# Altium PCB PCB1.PcbDoc
Units mil, origin at the board's own origin, x right, y up, seen from the top; angles counter-clockwise.
Board outline 3150 x 2365 mil, 2 copper layers (Top Layer, Bottom Layer); 17 components, 21 nets, 79 pads, 0 vias.
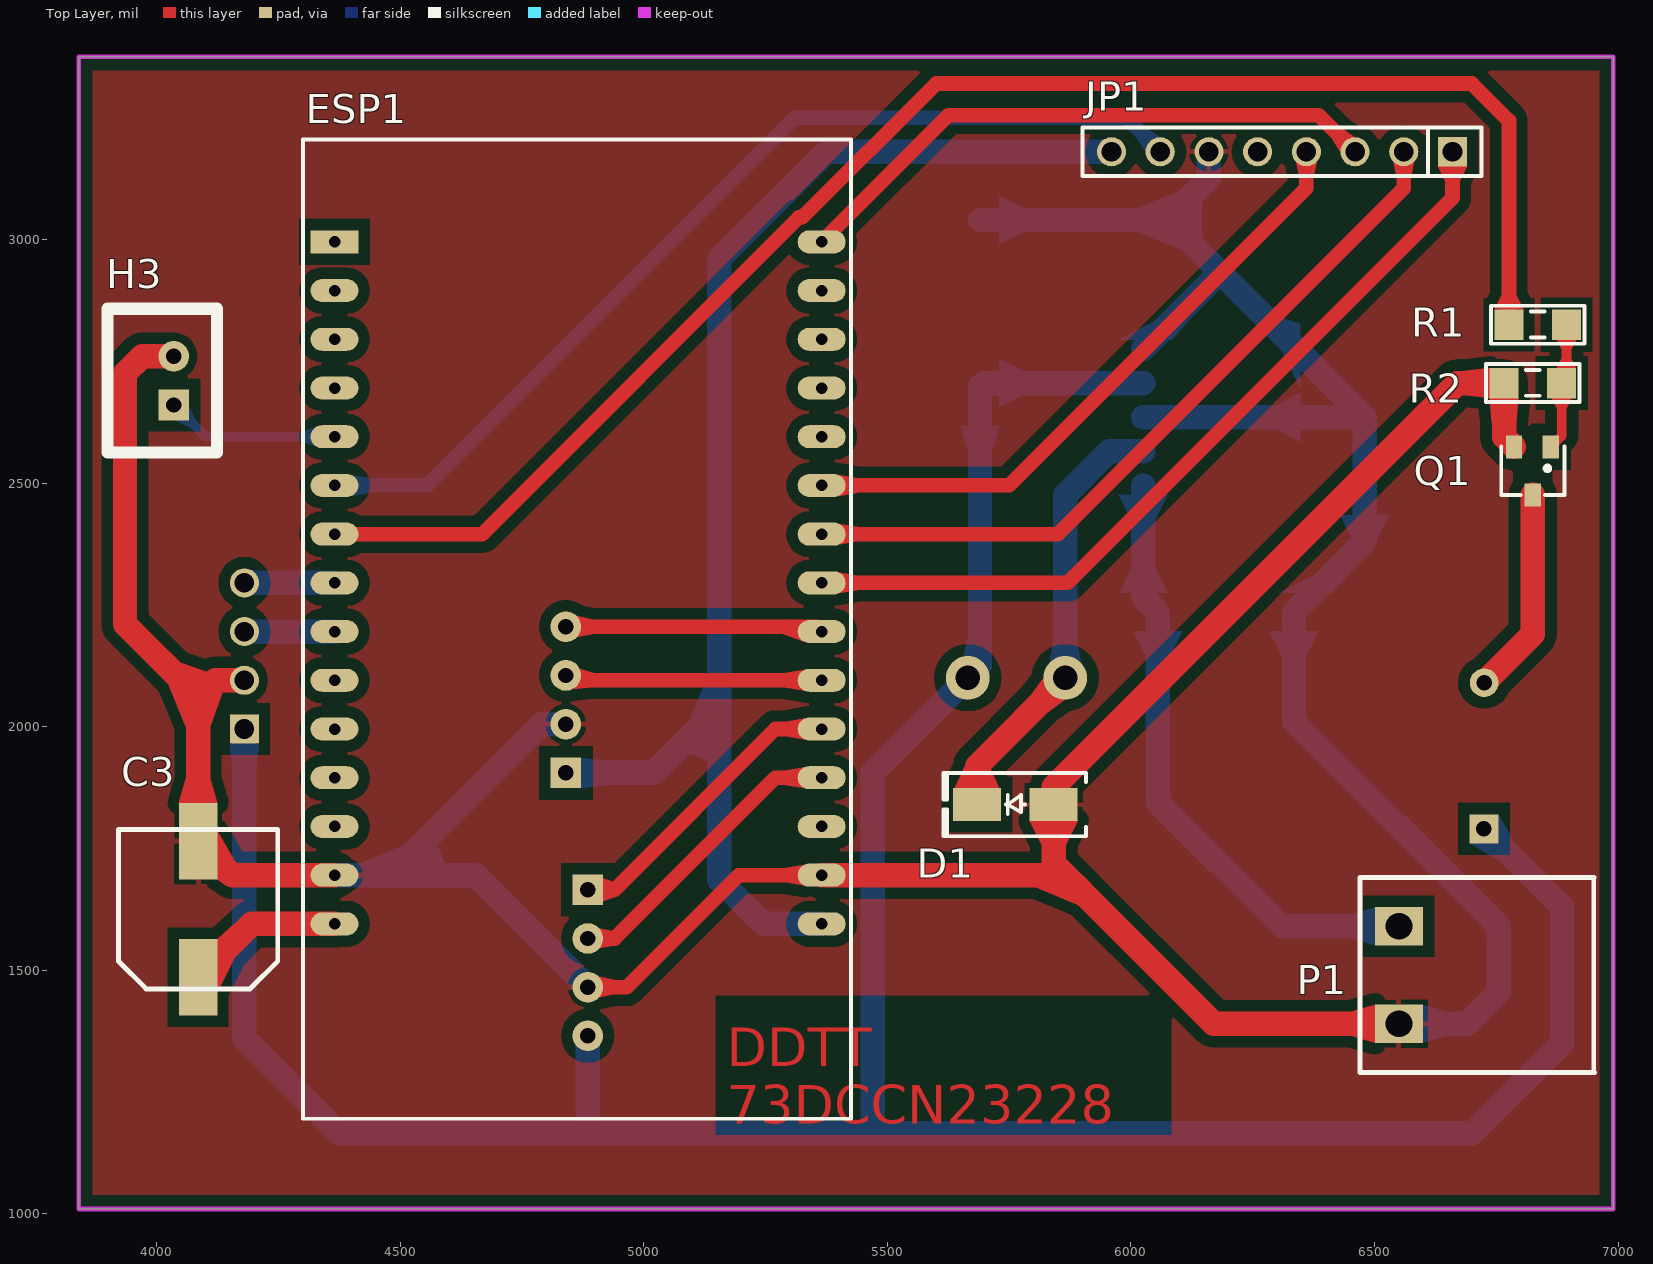
[diagram p0: Top Layer view]
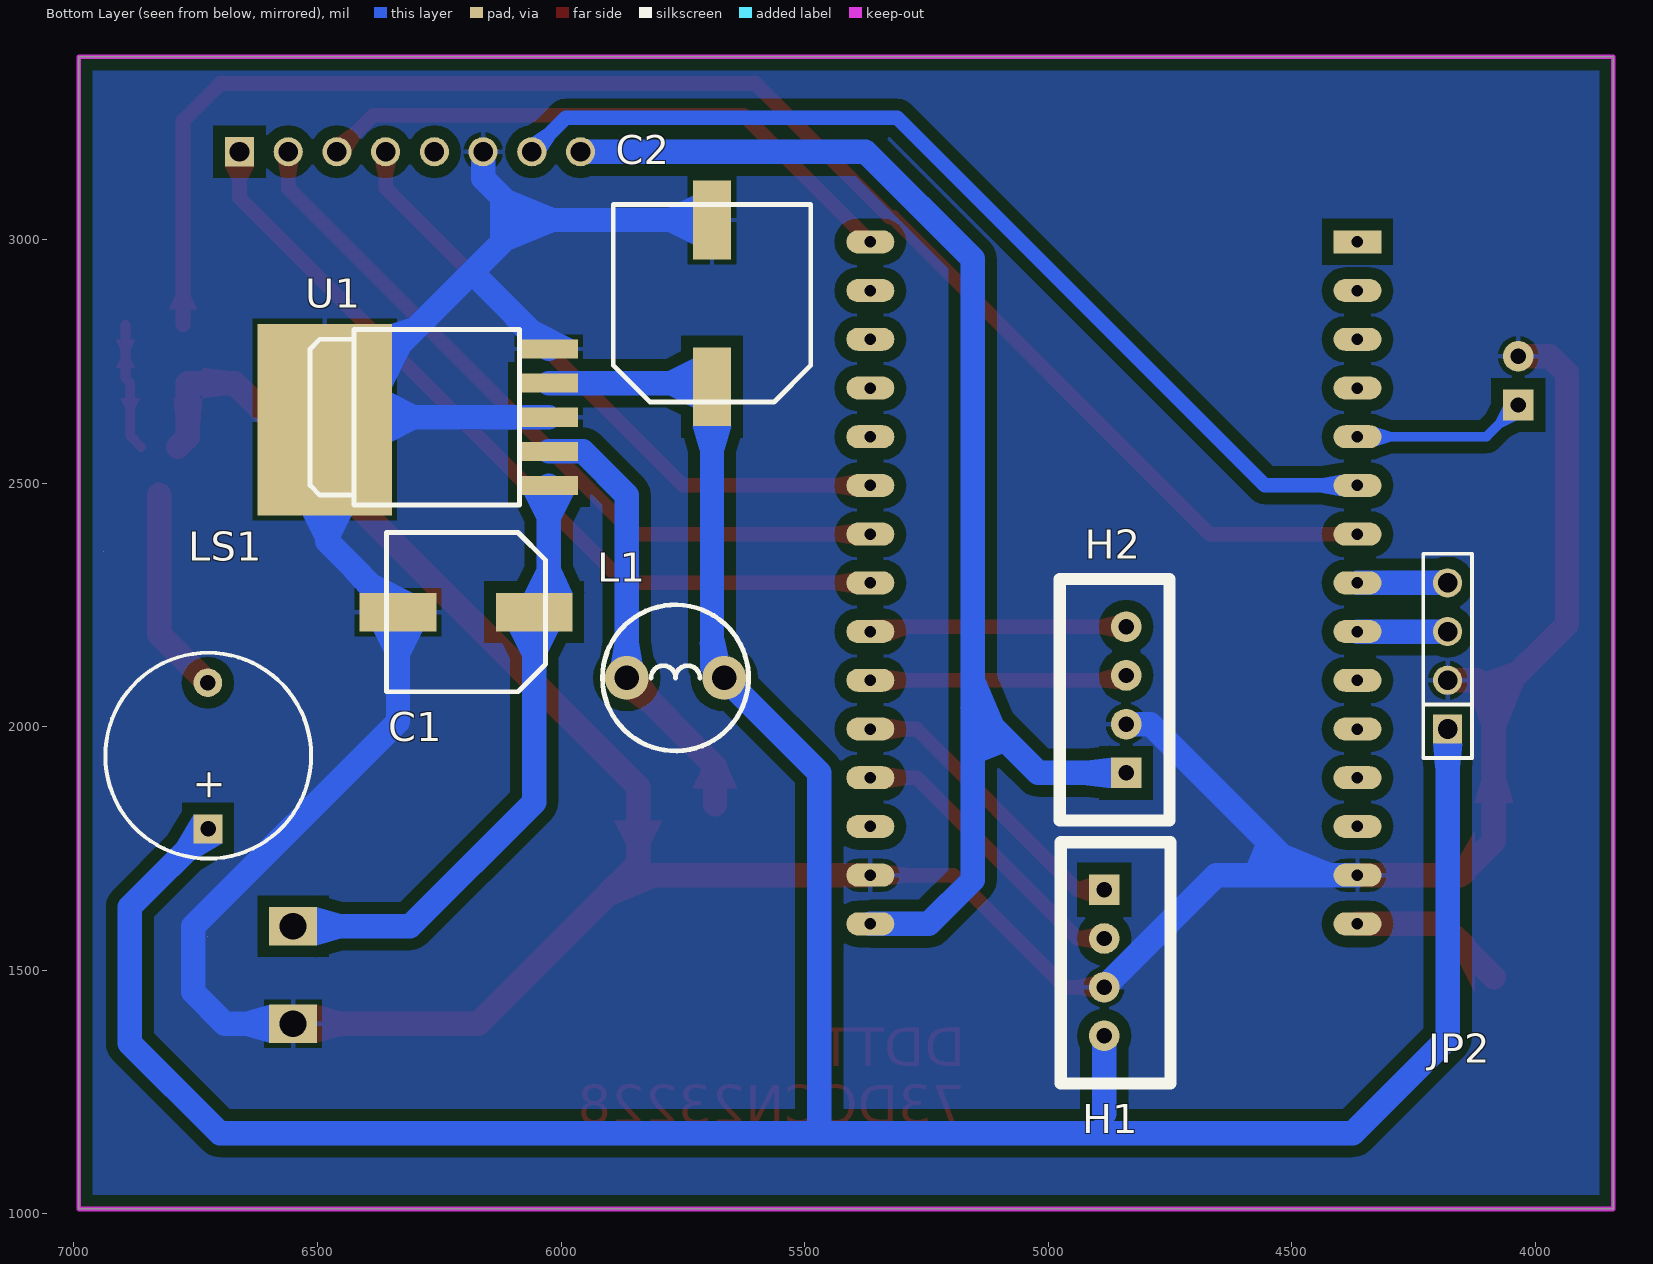
[diagram p1: Bottom Layer view, seen from below]

## Layer stack, top to bottom
Top Solder: solder mask 0.4, Solder Resist, Dk 3.5
Top Layer: signal copper 1.4
Dielectric 1: dielectric 12.6, FR-4, Dk 4.8
Bottom Layer: signal copper 1.4
Bottom Solder: solder mask 0.4, Solder Resist, Dk 3.5

## Board outline
3840,1010 3840,3375 6990,3375 6990,1010
cut-out: 6725,1570
cut-out: 6940,2360

## Design rules (kind name [scope] priority, off if disabled: settings)
Clearance [All] p1: gap=11.81 ignorepadtopadclearanceinfootprint=FALSE
PolygonConnect [All] p1: connectstyle=Relief reliefconductorwidth=10 reliefentries=4 polygonreliefangle="90 Angle" airgapwidth=10
RoutingVias [All] p1: holewidth=28 width=50 viastyle="Through Hole" minholewidth=28 minwidth=50 maxholewidth=28 maxwidth=50
SolderMaskExpansion [All] p1: expansion=4
Width [All] p1: maxlimit=50 minlimit=15 preferedwidth=30
30 further rules are at their usual default settings.

## Components (designator, comment, footprint, x,y, rotation, side; value= is the part's Value field where it differs from the comment)
C1 "100uF/50v" "tu nhom 8 (f)" 6195,2235 r0 bottom
C2 "1000uF/10v" "tu nhom 10 (G)" 5690,2868.74 r90 bottom
C3 "100uF/50v" "tu nhom 8 (f)" 4085,1625 r90 top
D1 "SS34" "DIODE SMA" 5762.64,1840 r180 top
ESP1 "ESP32 DEVKIT" "ESP32 WROOM 32 KIT" 4365,2995 r0 top
H1 "Module_SIM" XH2.54M-4 4885,1665 r270 bottom
H2 "NEO7-GPS" XH2.54M-4 4840,1905 r90 bottom
H3 "Micro switch" XH2.54M-2 4035,2660 r90 top
JP1 "RFID" "JP 1x8 CT" 6660,3180 r180 top
JP2 "L9110S" "JP 1x4 CT" 4180,1995 r90 bottom
L1 "100uH 3A" "CUON CAM 100uH3A" 5765,2100 r180 bottom
LS1 "Coi Chip Speaker" "Coi Chip Speacker" 6724.5,1790 r90 bottom
P1 "Terminal Block" "CON 2 2EDG5.08" 6550,1590 r270 top
Q1 "HF" SOT-23 6825,2525 r180 top value=C9014
R1 "1k" "tro smd 1206" 6835,2825 r0 top
R2 "10k" "tro smd 1206" 6825,2705 r0 top
U1 "LM2576HVS 5.0V SMD" TO263-5 6255,2635 r90 bottom

## Footprints (in the part's own frame and the unit in brackets; to place one, negate y for a bottom-side part, rotate by r counter-clockwise, add the part's x,y. Pads: shape width x height; smd on the part's side, far side on the other; paste and mask are expansions set on the pad)
"Coi Chip Speacker" [mm]
  rect 1.5x1.5 hole 0.8: 1(0,0)
  round 1.5 hole 0.8: 2(7.62,0.013)
  silkscreen extent -1.55,-5.38 9.18,5.36, body extent -2.22,-6 13.24,6, height 4.5
"CON 2 2EDG5.08" [mm]
  rect 2x2.5 hole 1.4: 1(0,0) 2(5.08,0)
  silkscreen extent -2.54,-2.03 7.62,10.21, body extent -2.5,-1.75 7.58,10.25, height 3.15
"CUON CAM 100uH3A" [mil] "100uH3A"
  round 90 hole 50: 1(-100,0) 2(100,0)
  silkscreen extent -150,-150 150,150, body extent -171,-175 171,167, height 394
"DIODE SMA" [mm] "SMA"
  rect 2.5x1.7 smd: 1(-2,0) 2(2,0)
  silkscreen extent -3.68,-1.65 3.75,1.65, body extent -2.6,-1.37 2.6,1.37, height 2.4
"ESP32 WROOM 32 KIT" [mm]
  rect 2.5x1.2 hole 0.6: 1(0,0)
  oval 2.5x1.2 hole 0.6: 2(0,-2.54) 3(0,-5.08) 4(0,-7.62) 5(0,-10.16) 6(0,-12.7) 7(0,-15.24) 8(0,-17.78) 9(0,-20.32) 10(0,-22.86) 11(0,-25.4) 12(0,-27.94) 13(0,-30.48) 14(0,-33.02) 15(0,-35.56) 16(25.4,-35.56) 17(25.4,-33.02) 18(25.4,-30.48) 19(25.4,-27.94) 20(25.4,-25.4) 21(25.4,-22.86) 22(25.4,-20.32) 23(25.4,-17.78) 24(25.4,-15.24) 25(25.4,-12.7) 26(25.4,-10.16) 27(25.4,-7.62) 28(25.4,-5.08) 29(25.4,-2.54) 30(25.4,0)
  silkscreen extent -1.65,-45.72 26.92,5.33, body extent -1.65,-45.6 26.85,5.33, height 10.49
"JP 1x4 CT" [mm]
  rect 1.52x1.52 hole 1.02: 1(0,0)
  round 1.52 hole 1.02: 2(2.54,0) 3(5.08,0) 4(7.62,0)
  silkscreen extent -1.52,-1.27 9.14,1.27, body extent -1.52,-1.25 9.14,1.25, height 8.51
"JP 1x8 CT" [mm] "8 row, straight, gold plating"
  rect 1.52x1.52 hole 1.02: 1(0,0)
  round 1.52 hole 1.02: 2(2.54,0) 3(5.08,0) 4(7.62,0) 5(10.16,0) 6(12.7,0) 7(15.24,0) 8(17.78,0)
  silkscreen extent -1.52,-1.27 19.3,1.27, body extent -1.52,-1.25 19.3,1.25, height 8.51
SOT-23 [mm] "SOT 23 _ 1-3-2"
  rect 0.85x1.2 smd: 1(-0.94,-1.245) 2(0.985,-1.25) 3(0.005,1.25)
  silkscreen extent -1.65,-1.27 1.65,1.27, body extent -1.47,-1.33 1.53,1.17, height 1.06
TO263-5 [mil] "TO263-5"
  rect 39.37x120 smd: 1(-140,-230) 2(-70,-230) 3(0,-230) 4(70,-230) 5(140,-230)
  rect 393.7x275.59 smd: 6(-5,230)
  silkscreen extent -180,-170 180,260, body extent -200,-242 200,310, height 180
"tro smd 1206" [mm]
  rect 1.5x1.6 smd: 1(-1.5,0) 2(1.5,0)
  silkscreen extent -2.44,-0.99 2.44,0.99, body extent -1.6,-0.8 1.6,0.8, height 0.6
"tu nhom 8 (f)" [mm]
  rect 4x2 smd: 1(-3.55,0) 2(3.55,0)
  silkscreen extent -4.15,-4.15 4.15,4.15, body extent -4.85,-4.25 4.85,4.25, height 10.5
"tu nhom 10 (G)" [mm]
  rect 4.1x2 smd: 1(-4.35,0) 2(4.35,0)
  silkscreen extent -5.15,-5.15 5.15,5.15, body extent -5.9,-5.25 5.9,5.25, height 10.5
XH2.54M-2 [mm]
  rect 1.6x1.6 hole 0.8: 1(0,0)
  round 1.6 hole 0.8: 2(2.54,0)
  silkscreen extent -2.48,-2.26 5.02,3.46, body extent -2.48,-2.26 5.02,3.48, height 6.91
XH2.54M-4 [mm]
  rect 1.6x1.6 hole 0.8: 1(0,0)
  round 1.6 hole 0.8: 2(2.54,0) 3(5.08,0) 4(7.62,0)
  silkscreen extent -2.48,-2.26 10.1,3.46, body extent -2.48,-2.26 10.1,3.48, height 6.91

## Part data
C1 C3: library part "Tu Nhom 100uF 50V", "Dán", Chung_Loai=Dán, Don_Vi=Con, Ma_Hang=MH002223, So_Chan=2, Ten_Linh_Kien="T? Nhôm 100uF 50V 8x10.2MM"
C2: library part "Tu Nhom 1000uF 10V", "Dán", Chung_Loai=Dán, Don_Vi=Con, Ma_Hang=MH007515, So_Chan=2, Ten_Linh_Kien="T? Nhôm 1000uF 10V"
D1: library part "Diode SS34 ( 1N5822 )", "Dán", Chung_Loai=Dán, Don_Vi=Con, Ma_Hang=MH002104, Ten_Linh_Kien="Diode SS34 3A 40V SMA ( 1N5822 SS34A)"
ESP1: library part "ESP32 WROOM 32 KIT"
H1 H2: library part "Header 4P 2.54 Duc Thang", "C?m", Chung_Loai=C?m, Don_Vi=Con, Ma_Hang=MH001285, Ten_Linh_Kien="Header 4P XH2.54-4P Ð?c Th?ng"
H3: library part "Header 2P 2.54 Duc Thang", "C?m", Chung_Loai=C?m, Don_Vi=Con, Ma_Hang=MH001283, Ten_Linh_Kien="Header 2P XH2.54-2P Ð?c Th?ng"
JP1: library part "JP 1x8 2.54 Cai Thang", "C?m", Chung_Loai=C?m, Don_Vi=Con, Ma_Hang=MH004006, Ten_Linh_Kien="Jump Ðon Cái 2.54MM 1x20P Th?ng"
JP2: library part "JP 1x4 2.54 Cai Thang", "C?m", Chung_Loai=C?m, Don_Vi=Con, Ma_Hang=MH004006, Ten_Linh_Kien="Jump Ðon Cái 2.54MM 1x20P Th?ng"
L1: library part "CUON CAM 100uH DIP", "Dán", Chung_Loai=Dán, Don_Vi=Con, Ma_Hang=MH002209, Ten_Linh_Kien="Cu?n C?m 100uH 3A 8x10MM"
LS1: "Còi chip"
P1: library part "CON 2 EDG5.08", "C?m", Chung_Loai=C?m, Don_Vi=Con, Ma_Hang=MH000759, Ten_Linh_Kien="CON 2 2EDG5.08-2P 5.08MM ( Xanh Cong)"
Q1: library part "Trans C1815 HF SMD", "SOT-23", =C9012
R1: library part "Tro 1206 1% 1k", "Dán", Chung_Loai=Dán, Don_Vi=Con, Ma_Hang=MH005880, So_Chan=2, Ten_Linh_Kien="Tr? 1206 1% 1k"
R2: library part "Tro 1206 1% 10k", "Dán", Chung_Loai=Dán, Don_Vi=Con, Ma_Hang=MH005885, So_Chan=2, Ten_Linh_Kien="Tr? 1206 1% 10k"
U1: "Dán", Chung_Loai=Dán, Don_Vi=Con, Ma_Hang=MH002362, Ten_Linh_Kien="LM2576HVS-5.0V BUCK 5V 3A TO263-5"

## Nets (pads, with @x,y where several pads share a name; then routed paths per layer and width w, separated by ;. In a path a pad name is that pad's centre, name@x,y a point inside that pad or via, vN(x,y) a via of type N, cw(c..) or ccw(c..) an arc to the next point about the centre after c; other vN are vias at no path point)
3V3: ESP1.16 H2.1 JP1.8 | length 2789.3
  Bottom Layer w50: H2.1 5020,1905 5155,2040 ; ESP1.16 5245,1595 5155,1685 5155,2040 ; JP1.8 5375,3180 5155,2960 5155,2040
+5: C2.1 H1.4 JP2.1 L1.2 LS1.1 U1.4 | length 6125.6
  Bottom Layer w50: JP2.1 4180,1360 4375,1165 5470,1165 ; 4885,1205 H1.4 ; U1.4 5697.52,2705 C2.1 5690,2125 L1.2 5470,1905 5470,1165 ; LS1.1 6885,1629.5 6885,1350 6700,1165 5470,1165
+9: C1.1 P1.1 U1.1 | length 1263.1
  Bottom Layer w50: U1.1 6025,2265.24 C1.1 6055.24,1844.76 6310,1590 P1.1
B-1A: ESP1.8 JP2.4 | length 185
  Bottom Layer w50: JP2.4 ESP1.8
B-1B: ESP1.9 JP2.3 | length 185
  Bottom Layer w50: JP2.3 ESP1.9
Coi: ESP1.7 R1.1 | length 3244.6
  Top Layer w30: ESP1.7 4668.09,2395 5318.52,3045.43 5325.43,3045.43 5600,3320 6700,3320 6775.94,3244.06 R1.1
Com: ESP1.5 H3.1 | length 356.9
  Bottom Layer w20: H3.1 4100,2595 ESP1.5
GND: C1.2 C2.2 C3.2 D1.1 ESP1.14 ESP1.17 H1.3 H2.2 H3.2 JP1.6 JP2.2 P1.2 Q1.2 R2.1 U1.3 U1.5 U1.6 | length 9602
  Top Layer w30: H1.3 4965,1465 5195,1695 ESP1.17
  Top Layer w50: H3.2 3970,2760 3935,2725 3935,2210 4085,2060 ; JP2.2 4120,2095 4085,2060 ; ESP1.14 4154.76,1695 C3.2 4085,2060 ; ESP1.17 5865,1695 ; P1.2 6170,1390 5865,1695 ; Q1.2 6765.94,2594.47 R2.1 6670,2705 5841.38,1876.38 D1.1 5841.38,1718.62 5865,1695
  Bottom Layer w50: ESP1.14 4480,1695 ; H2.2 4790,2005 4480,1695 ; H1.3 4655,1695 4480,1695 ; C2.2 6075,3040 ; U1.3 U1.6@6480,2635 ; U1.5 6180,2930 6185,2930 ; JP1.6 6160,3125 6075,3040 ; P1.2 6690,1390 6755,1455 6755,1590 6334.76,2010.24 C1.2 6480,2380.24 U1.6@6480,2635 ; 6075,3040 6185,2930 ; 6185,2930 U1.6@6480,2635
MISO: ESP1.25 JP1.4 | length 1322.7
  Top Layer w30: ESP1.25 5750,2495 6360,3105 JP1.4
MOSI: ESP1.30 JP1.3 | length 1233.8
  Top Layer w30: ESP1.30 5625,3255 6385,3255 JP1.3
NetC3_1: C3.1 ESP1.15 | length 325.5
  Top Layer w50: C3.1 4194.76,1595 ESP1.15
NetD1_2: D1.2 L1.1 U1.2 | length 907.3
  Top Layer w50: D1.2 5683.9,1918.9 L1.1
  Bottom Layer w50: L1.1 5865,2475 5955,2565 U1.2
NetLS1_2: LS1.2 Q1.3 | length 427.1
  Top Layer w50: LS1.2 6824.8,2189.8 Q1.3
NetQ1_1: Q1.1 R1.2 R2.2 | length 264.3
  Top Layer w20: Q1.1 6884.06,2596.06 R2.2 6894.06,2715 R1.2
Reset: ESP1.6 JP1.7 | length 2036.7
  Bottom Layer w30: ESP1.6 4555,2495 5310,3250 5990,3250 JP1.7
RXD: ESP1.22 H2.4 | length 529.1
  Top Layer w30: H2.4 5355,2205 ESP1.22
SCK: ESP1.24 JP1.2 | length 1564.1
  Top Layer w30: ESP1.24 5850,2395 6560,3105 JP1.2
SDA: ESP1.23 JP1.1 | length 1717.2
  Top Layer w30: ESP1.23 5870,2295 6660,3085 JP1.1
SIM_RX: ESP1.20 H1.1 | length 616.7
  Top Layer w30: H1.1 4940,1665 5270,1995 ESP1.20
SIM_TX: ESP1.19 H1.2 | length 616.7
  Top Layer w30: H1.2 4940,1565 5270,1895 ESP1.19
TXD: ESP1.21 H2.3 | length 529.1
  Top Layer w30: H2.3 4850,2095 ESP1.21
pads on no net: ESP1.1 ESP1.2 ESP1.3 ESP1.4 ESP1.10 ESP1.11 ESP1.12 ESP1.13 ESP1.18 ESP1.26 ESP1.27 ESP1.28 ESP1.29 JP1.5

## Polygon pours and split planes (outlines as drawn)
GND on Top Layer "GND_L01_P016" (solid, remove dead copper, pour order 16): 3840,1010 3840,3375 6990,3375 6990,1010
GND on Bottom Layer "GND_L02_P018" (solid, remove dead copper, pour order 18): 6990,1010 6990,3375 3840,3375 3840,1010

## Keep-outs
Keep-Out Layer:
  the board outline again, w10

## Other copper
Top Layer:
  text "DDTT / 73DCCN23228" at 5170,1185 h78.74

## Text inside footprints (layer, text, board x,y; h text height)
LS1: Bottom Overlay "+" at 6696.5,1845.5 h60 r270